# EAGLE board core (EAGLE 7.1.0)
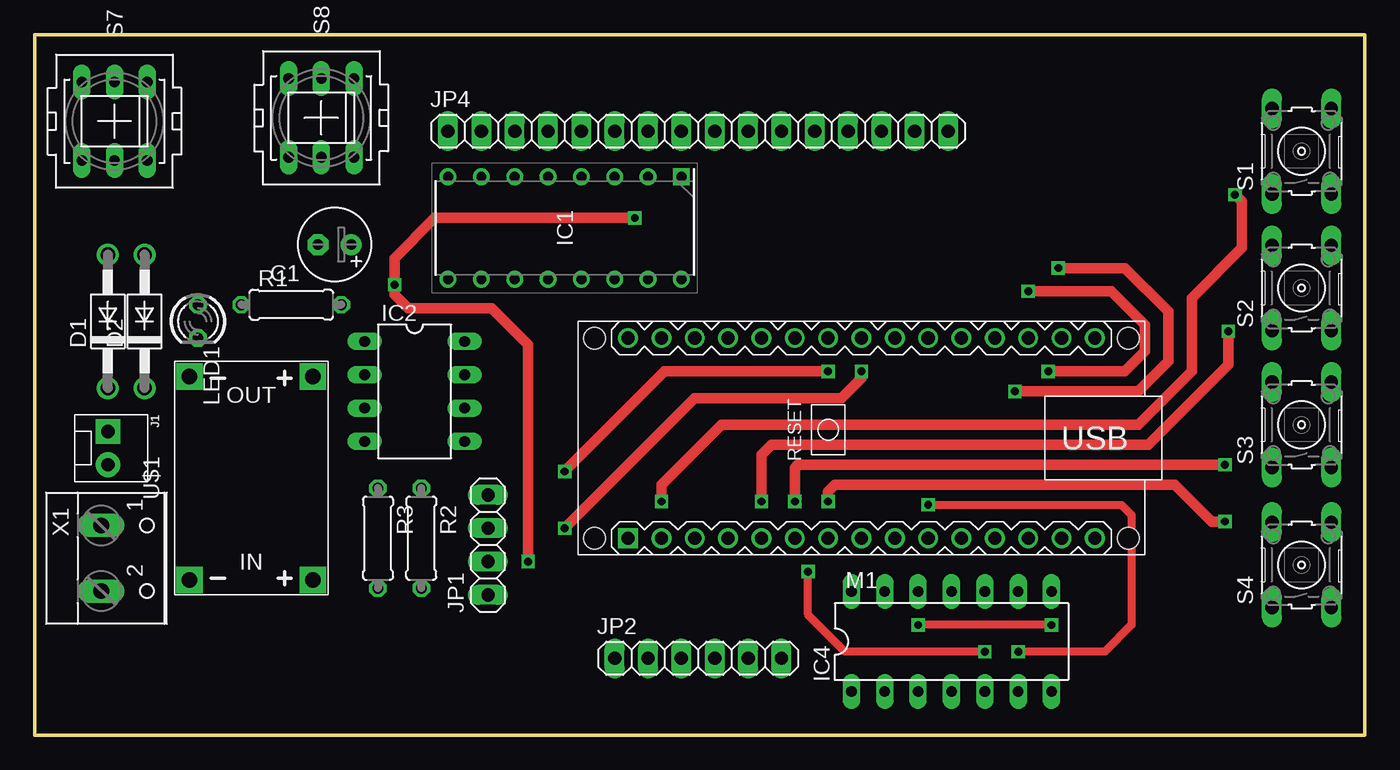
[diagram p0: board, top side]
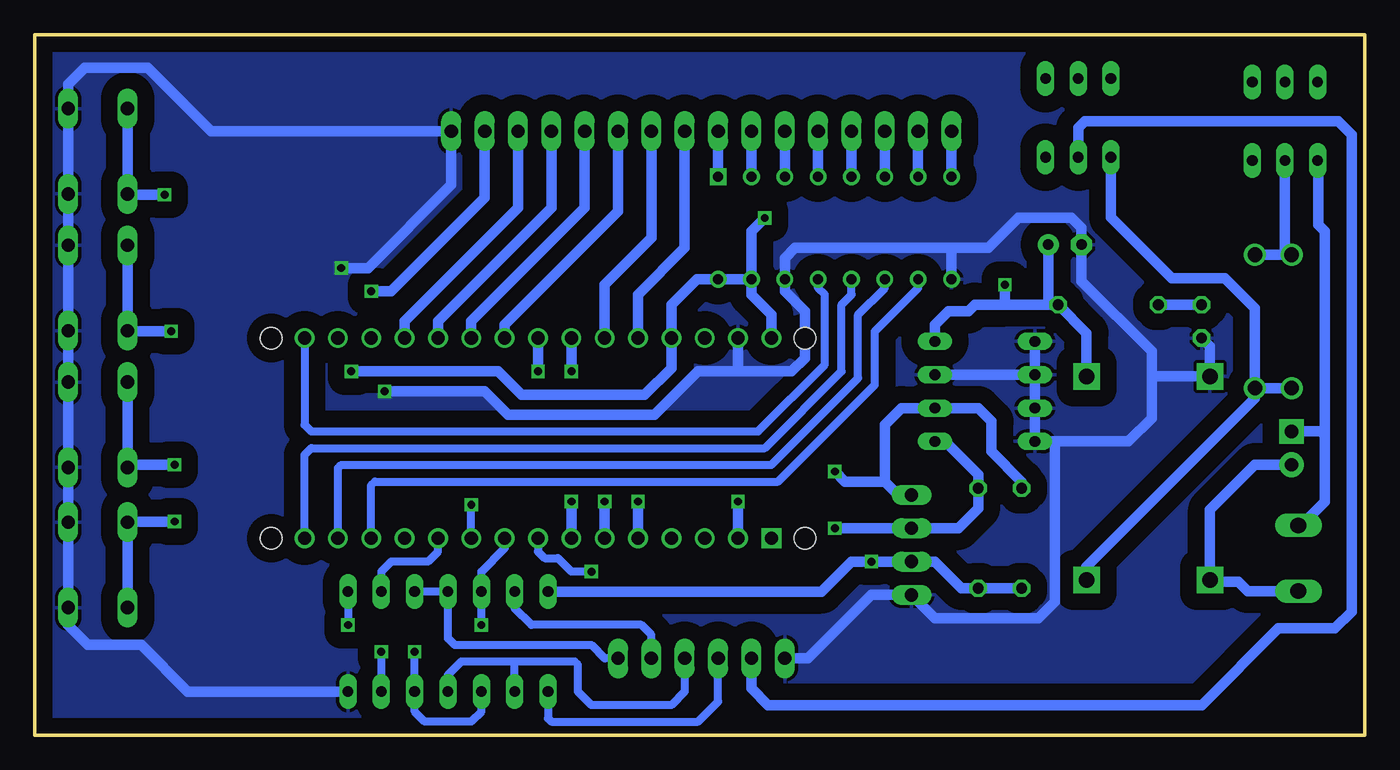
[diagram p1: board, bottom side, seen from below]

Size 101.35 x 53.34 mm. Coordinates in mm from the lower left corner, seen from the top.
Outline: 0,53.34 101.35,53.34 101.35,0 0,0 0,53.34
Copper layers (1*16): Top 0.035mm / dielectric 1.5mm / Bottom 0.035mm
Design rules "default *": minimum track width 10mil, minimum drill 24mil, track to track 50mil, track to pad 50mil, pad to pad 8mil, via to via 8mil, smd to smd 8mil, copper to edge 40mil, drill to drill 8mil, minimum pad ring 10mil, minimum via ring 8mil, stop-mask expansion 4mil, vias tented up to drill 0mil, thermal gap 10mil

## Footprints (pad centres in the part's own frame; a part is rotated, then mirrored left to right if it is on the bottom)
E2,5-6 = drill 0.813 pad 1.6: + -1.27,0 | drill 0.813 pad 1.6 octagon: - 1.27,0
DO41-10 = drill 1.118: A 5.08,0; C -5.08,0
DIP781W56P254L1918H533Q16N = drill 0.759 pad 1.159 square: 1 -3.905,8.89 | drill 0.759 pad 1.159: 2 -3.905,6.35; 3 -3.905,3.81; 4 -3.905,1.27; 5 -3.905,-1.27; 6 -3.905,-3.81; 7 -3.905,-6.35; 8 -3.905,-8.89; 9 3.905,-8.89; 10 3.905,-6.35; 11 3.905,-3.81; 12 3.905,-1.27; 13 3.905,1.27; 14 3.905,3.81; 15 3.905,6.35; 16 3.905,8.89
DIL08 = drill 0.813 long: 1 -3.81,-3.81; 2 -1.27,-3.81; 3 1.27,-3.81; 4 3.81,-3.81; 5 3.81,3.81; 6 1.27,3.81; 7 -1.27,3.81; 8 -3.81,3.81
DIL14 = drill 0.813 long: 1 -7.62,-3.81; 2 -5.08,-3.81; 3 -2.54,-3.81; 4 0,-3.81; 5 2.54,-3.81; 6 5.08,-3.81; 7 7.62,-3.81; 8 7.62,3.81; 9 5.08,3.81; 10 2.54,3.81; 11 0,3.81; 12 -2.54,3.81; 13 -5.08,3.81; 14 -7.62,3.81
MOLEX-1X2 = drill 1.016 pad 1.88 square: 1 0,0 | drill 1.016 pad 1.88: 2 2.54,0
1X04 = drill 1.016 long: 1 -3.81,0; 2 -1.27,0; 3 1.27,0; 4 3.81,0
1X06 = drill 1.016 long: 1 -6.35,0; 2 -3.81,0; 3 -1.27,0; 4 1.27,0; 5 3.81,0; 6 6.35,0
1X16 = drill 1.016 long: 1 -19.05,0; 2 -16.51,0; 3 -13.97,0; 4 -11.43,0; 5 -8.89,0; 6 -6.35,0; 7 -3.81,0; 8 -1.27,0; 9 1.27,0; 10 3.81,0; 11 6.35,0; 12 8.89,0; 13 11.43,0; 14 13.97,0; 15 16.51,0; 16 19.05,0
LED3MM = drill 0.813 octagon: A -1.27,0; K 1.27,0
ARDUINO-NANO-3.0 = drill 1 square: J1.1 17.78,7.62 | drill 1: J1.2 15.24,7.62; J1.3 12.7,7.62; J1.4 10.16,7.62; J1.5 7.62,7.62; J1.6 5.08,7.62; J1.7 2.54,7.62; J1.8 0,7.62; J1.9 -2.54,7.62; J1.10 -5.08,7.62; J1.11 -7.62,7.62; J1.12 -10.16,7.62; J1.13 -12.7,7.62; J1.14 -15.24,7.62; J1.15 -17.78,7.62; J2.1 17.78,-7.62; J2.2 15.24,-7.62; J2.3 12.7,-7.62; J2.4 10.16,-7.62; J2.5 7.62,-7.62; J2.6 5.08,-7.62; J2.7 2.54,-7.62; J2.8 0,-7.62; J2.9 -2.54,-7.62; J2.10 -5.08,-7.62; J2.11 -7.62,-7.62; J2.12 -10.16,-7.62; J2.13 -12.7,-7.62; J2.14 -15.24,-7.62; J2.15 -17.78,-7.62 | hole 1.651: -20.32,7.62; -20.32,-7.62; 20.32,-7.62; 20.32,7.62
0207/7 = drill 0.813 octagon: 1 -3.81,0; 2 3.81,0
B3F-10XX = drill 1.016 long: 1 -3.251,2.261; 2 3.251,2.261; 3 -3.251,-2.261; 4 3.251,-2.261
PVA2R = drill 0.813 long: 1 -2.997,2.489; 2 -2.997,0; 3 -2.997,-2.489; 4 2.997,2.489; 5 2.997,0; 6 2.997,-2.489
DC-DC-STEP-DOWN-MP2307 = drill 1.2 pad 2 square: IN+ -7.747,-4.699; IN- -7.747,4.699; OUT+ 7.747,-4.699; OUT- 7.747,4.699
W237-102 = drill 1.194 long: 1 -2.5,-1.27; 2 2.5,-1.27

## Placement (x,y rotation side)
C1  [E2,5-6]  22.86,37.34 180 top
D1  1N4004  [DO41-10]  5.59,31.5 90 top
D2  1N4004  [DO41-10]  8.38,31.5 90 top
IC1  MCP3008-I_P  [DIP781W56P254L1918H533Q16N]  40.39,38.61 270 top
IC2  AT24CP  [DIL08]  28.96,26.16 270 top
IC4  7402N  [DIL14]  69.85,7.11 0 top
J1  [MOLEX-1X2]  5.59,23.11 270 top
JP1  [1X04]  34.54,14.48 90 top
JP2  [1X06]  50.55,5.84 0 top
JP4  [1X16]  50.55,45.97 0 top
LED1  [LED3MM]  12.45,31.5 270 top
M1  ARDUINO-NANO-3.0  [ARDUINO-NANO-3.0]  62.99,22.61 180 top
R1  330  [0207/7]  19.56,32.77 0 top
R2  4.7K  [0207/7]  29.46,14.99 270 top
R3  4.7K  [0207/7]  26.16,14.99 270 top
S1  [B3F-10XX]  96.52,44.45 90 top
S2  [B3F-10XX]  96.52,34.04 90 top
S3  [B3F-10XX]  96.52,23.62 90 top
S4  [B3F-10XX]  96.52,12.95 90 top
S7  [PVA2R]  6.1,46.74 90 top
S8  [PVA2R]  21.84,46.99 90 top
U$1  DC-DC-STEP-DOWN-MP2307  [DC-DC-STEP-DOWN-MP2307]  16.51,19.56 90 top
X1  [W237-102]  6.35,13.46 270 top

## Library data of the parts
C1 R1-R3 = rcl
D1 D2 = diode
IC1 = MCP3008-I_P; ALLIED_NUMBER: 70414364; ALLIED_PRICE-STOCK: http://www.alliedelec.com/microchip-technology-inc-mcp3008-i-p/70414364/; DESCRIPTION: 2.7V 4-Channel/8-Channel 10-Bit A/D Converterswith SPI Serial Interface; HEIGHT: 5.334mm; MANUFACTURER_NAME: Microchip; MANUFACTURER_PART_NUMBER: MCP3008-I/P; MOUSER_PART_NUMBER: 579-MCP3008-I/P; MOUSER_PRICE-STOCK: https://www.mouser.com/Search/Refine.aspx?Keyword=579-MCP3008-I%2FP; RS_PART_NUMBER: 6696064P; RS_PRICE-STOCK: http://uk.rs-online.com/web/p/products/6696064P
IC2 = atmel; MPN: AT24C1024BW-SH-B; OC_FARNELL: 1362646; OC_NEWARK: 03P2044
IC4 = 74xx-us
J1 = SparkFun-Retired; SF_ID: PRT-09918
JP1 JP2 JP4 = pinhead
LED1 = led
M1 U$1 = diy-modules
S1-S4 = switch-omron; MPN: B3F-1000; OC_FARNELL: 176432; OC_NEWARK: 36M3542
S7 S8 = switch-misc
X1 = con-wago-500; MPN: 237-102; OC_FARNELL: unknown; OC_NEWARK: 70K9898

## Nets
1A: IC4.1 JP2.3
1B: IC4.2 IC4.4 JP2.4
2A: IC4.13 JP2.5
2B: IC4.10 IC4.11 JP2.6
3V3: M1.J2.14
5V: C1.+ IC1.15 IC1.16 IC2.8 IC4.14 JP1.2 JP4.15 M1.J2.1 M1.J2.4 R1.2 R2.2 R3.2 U$1.OUT+
12V: J1.1 S7.1 X1.1
12VI: D1.C D2.C S8.1 U$1.IN+
A0: JP4.14 M1.J2.12
A1: JP4.13 M1.J2.11
A2: JP4.12 M1.J2.10
A3: JP4.11 M1.J2.9
A4: JP4.10 M1.J2.6
A5: JP4.9 M1.J2.5
A6: IC1.1 JP4.8
A7: IC1.2 JP4.7
A8: IC1.3 JP4.6
A9: IC1.4 JP4.5
A10: IC1.5 JP4.4
A11: IC1.6 JP4.3
A12: IC1.7 JP4.2
A13: IC1.8 JP4.1
B1: M1.J1.1
B2: M1.J1.2 S1.1 S1.2
B3: M1.J1.5 S2.1 S2.2
B4: M1.J1.6 S3.1 S3.2
B5: M1.J1.7 S4.1 S4.2
B6: M1.J1.12
CS: IC1.10 M1.J1.13
DIR1: IC4.6 M1.J1.10
DIR2: IC4.9 M1.J1.11
GND: C1.- IC1.9 IC1.14 IC2.1 IC2.2 IC2.3 IC2.4 IC2.7 IC4.7 JP1.1 JP2.1 JP4.16 LED1.K M1.J2.2 S1.3 S1.4 S2.3 S2.4 S3.3 S3.4 S4.3 S4.4 U$1.OUT-
GND.1: M1.J1.4
GND_IN: J1.2 U$1.IN- X1.2
MISO: IC1.12 M1.J1.15
MOSI: IC1.11 M1.J1.14
N$1: D1.A D2.A S7.2
N$2: LED1.A R1.1
N$4: JP2.2 S8.2
PWM1: IC4.3 IC4.5 M1.J1.8
PWM2: IC4.8 IC4.12 M1.J1.9
RST: M1.J2.3
SCK: IC1.13 M1.J2.15
SCL: IC2.6 JP1.4 M1.J2.7 R3.1
SDA: IC2.5 JP1.3 M1.J2.8 R2.1

## Tracks (layer width: path | path; a pad name or v marks a point on that pad's centre or on a via)
1A
  Bottom 0.61: IC4.1 62.23,1.27 61.98,1.02 50.8,1.02 49.28,2.54 JP2.3
1B
  Bottom 0.61: IC4.2 64.77,5.59 | IC4.4 69.85,4.57 68.83,5.59 64.77,5.59 | JP2.4 51.82,3.3 52.83,2.29 58.93,2.29 59.94,3.3 59.94,5.33 60.2,5.59 64.77,5.59
2A
  Bottom 0.61: JP2.5 54.36,7.62 55.12,8.38 63.5,8.38 64.77,9.65 IC4.13
2B
  Bottom 0.61: IC4.10 IC4.11 69.85,7.37 69.34,6.86 58.93,6.86 57.91,5.84 JP2.6
5V  (via drill 0.6)
  Top 0.813: v77.22,27.69 83.06,27.69 84.58,29.21 84.58,31.24 82.04,33.78 v75.69,33.78 | v45.72,39.37 30.48,39.37 27.43,36.32 v27.43,34.29 27.43,33.53 28.45,32.51 34.8,32.51 37.59,29.72 v37.59,13.21
  Bottom 0.813: IC2.8 32.77,31.24 31.75,32.26 30.23,32.26 29.72,32.77 27.43,32.77 | IC1.15 IC1.16 50.89,34.7 52.83,32.77 M1.J2.4 52.83,27.94 54.86,25.91 64.26,25.91 66.04,27.69 v77.22,27.69 | M1.J2.1 45.21,32 46.74,33.53 IC1.15 | R3.2 R2.2 30.73,11.18 32.77,13.21 JP1.2 v37.59,13.21 39.12,13.21 41.4,10.92 IC4.14 | v75.69,33.78 74.17,33.78 67.06,40.89 JP4.15 | IC1.15 46.74,38.35 v45.72,39.37 | v27.43,34.29 27.43,32.77 | 23.88,32.77 R1.2 21.21,30.61 U$1.OUT+ | 23.88,32.77 27.43,32.77 | C1.+ 24.13,33.02 23.88,32.77
12V
  Bottom 0.813: X1.1 4.87,15.96 3.05,17.78 3.05,22.86 | J1.1 3.3,23.11 3.05,22.86 | 3.05,22.86 3.05,38.35 3.56,38.86 3.56,42.93 S7.1
12VI
  Bottom 0.813: S8.1 19.35,39.42 14.73,34.8 10.67,34.8 8.38,32.51 D2.C | D1.C D2.C | D2.C 8.38,25.65 21.21,12.83 U$1.IN+
A0
  Bottom 0.813: M1.J2.12 73.15,31.5 64.52,40.13 JP4.14
A1
  Bottom 0.813: M1.J2.11 70.61,31.5 61.98,40.13 JP4.13
A2
  Bottom 0.813: M1.J2.10 68.07,31.5 59.44,40.13 JP4.12
A3
  Bottom 0.813: M1.J2.9 65.53,31.24 56.9,39.88 JP4.11
A4
  Bottom 0.813: M1.J2.6 57.91,34.29 54.36,37.85 JP4.10
A5
  Bottom 0.813: M1.J2.5 55.37,33.53 51.82,37.08 JP4.9
A6
  Bottom 0.813: IC1.1 JP4.8
A7
  Bottom 0.813: IC1.2 JP4.7
A8
  Bottom 0.813: IC1.3 JP4.6
A9
  Bottom 0.813: JP4.5 IC1.4
A10
  Bottom 0.813: JP4.4 IC1.5
A11
  Bottom 0.813: JP4.3 IC1.6
A12
  Bottom 0.813: JP4.2 IC1.7
A13
  Bottom 0.813: JP4.1 IC1.8
B2  (via drill 0.6)
  Top 0.813: v47.75,17.78 47.75,19.05 52.32,23.62 84.07,23.62 88.14,27.69 88.14,33.27 91.95,37.08 91.95,40.64 v91.44,41.15
  Bottom 0.813: S1.2 S1.1 94.21,41.15 v91.44,41.15 | M1.J1.2 v47.75,17.78
B3  (via drill 0.6)
  Top 0.813: v55.37,17.78 55.37,21.34 56.13,22.1 84.84,22.1 90.93,28.19 v90.93,30.73
  Bottom 0.813: S2.2 S2.1 94.21,30.73 v90.93,30.73 | M1.J1.5 v55.37,17.78
B4  (via drill 0.6)
  Top 0.813: v57.91,17.78 57.91,20.32 58.17,20.57 v90.68,20.57
  Bottom 0.813: S3.2 S3.1 94.06,20.57 v90.68,20.57 | M1.J1.6 v57.91,17.78
B5  (via drill 0.6)
  Top 0.813: v60.45,17.78 60.45,18.54 60.96,19.05 86.87,19.05 89.66,16.26 v90.68,16.26
  Bottom 0.813: S4.1 S4.2 94.21,16.26 v90.68,16.26 | M1.J1.7 v60.45,17.78
CS
  Bottom 0.61: M1.J1.13 75.69,19.05 75.44,19.3 44.7,19.3 37.34,26.67 37.34,30.73 34.04,34.04 IC1.10
DIR1  (via drill 0.6)
  Top 0.61: v68.07,17.53 82.8,17.53 83.57,16.76 83.57,8.38 81.53,6.35 v74.93,6.35
  Bottom 0.61: M1.J1.10 v68.07,17.53 | v74.93,6.35 IC4.6
DIR2
  Bottom 0.61: M1.J1.11 70.61,13.97 71.37,13.21 74.17,13.21 74.93,12.45 IC4.9
GND  (via drill 0.6)
  Top 0.813: v74.68,26.16 84.07,26.16 86.36,28.45 86.36,32.26 83.06,35.56 v77.98,35.56
  Bottom 0.813: IC2.2 IC2.3 IC2.4 23.62,22.35 | IC2.2 IC2.1 | IC2.7 IC2.2 | 23.62,22.35 18.03,22.35 16.26,24.13 16.26,27.18 | M1.J2.2 47.75,27.69 | IC1.9 31.5,36.83 31.24,37.08 | 31.24,37.08 28.7,37.08 26.42,39.37 22.35,39.37 21.59,38.61 C1.- 21.59,34.54 16.26,29.21 16.26,27.18 | 31.24,37.08 43.43,37.08 44.2,36.32 IC1.14 44.2,33.78 42.67,32.26 42.67,28.7 43.69,27.69 47.75,27.69 | 23.62,22.35 23.62,10.16 24.89,8.89 32.77,8.89 JP1.1 37.59,10.67 42.42,5.84 JP2.1 | 47.75,27.69 50.8,27.69 54.1,24.38 65.28,24.38 67.06,26.16 v74.68,26.16 | v77.98,35.56 75.95,35.56 69.6,41.91 JP4.16 87.88,45.97 92.71,50.8 97.54,50.8 98.78,49.55 S1.4 S1.3 S2.4 S2.3 S3.4 S3.3 S4.4 S4.3 98.81,9.68 98.81,8.38 97.28,6.86 93.22,6.86 89.66,3.3 IC4.7 | LED1.K 11.81,29.59 U$1.OUT- 16.13,27.3 16.26,27.18
  pour Bottom: 0,53.34 101.35,53.34 101.35,0 0,0
GND_IN
  Bottom 0.813: J1.2 8.38,20.57 11.81,17.14 U$1.IN- 11.68,11.68 9.65,11.68 8.93,10.96 X1.2
MISO
  Bottom 0.61: M1.J1.15 80.77,21.34 80.26,21.84 45.72,21.84 39.88,27.69 39.88,32.77 39.12,33.53 IC1.12
MOSI
  Bottom 0.61: M1.J1.14 78.23,20.32 77.98,20.57 45.21,20.57 38.61,27.18 38.61,32 36.58,34.04 IC1.11
N$1
  Bottom 0.813: D2.A 6.1,36.58 | 6.1,36.58 D1.A | S7.2 6.1,36.58
N$2
  Bottom 0.813: R1.1 LED1.A
N$3
  Bottom 0.127: 0,53.34 101.35,53.34 101.35,0 0,0 0,53.34
N$4
  Bottom 0.813: JP2.2 46.74,3.56 45.47,2.29 12.45,2.29 6.6,8.13 2.29,8.13 1.02,9.4 1.02,45.72 2.03,46.74 21.34,46.74 21.84,46.23 S8.2
N$5
  Top 0.127: 0,53.34 101.35,53.34 101.35,0 0,0 0,53.34
PWM1  (via drill 0.6)
  Top 0.61: v72.39,6.35 61.72,6.35 58.93,9.14 v58.93,12.45
  Bottom 0.61: IC4.3 67.31,1.78 68.07,1.02 71.63,1.02 72.39,1.78 IC4.5 v72.39,6.35 | v58.93,12.45 60.45,12.45 61.47,13.46 62.48,13.46 62.99,13.97 M1.J1.8
PWM2  (via drill 0.6)
  Top 0.61: v77.47,8.38 v67.31,8.38
  Bottom 0.61: M1.J1.9 65.53,14.22 67.31,12.45 IC4.12 v67.31,8.38 | IC4.8 v77.47,8.38
SCK
  Bottom 0.61: IC1.13 41.66,34.04 41.15,33.53 41.15,28.19 46.23,23.11 80.26,23.11 80.77,23.62 M1.J2.15
SCL  (via drill 0.6)
  Top 0.813: v60.45,27.69 48.01,27.69 v40.39,20.07
  Bottom 0.813: R3.1 26.16,19.3 28.45,21.59 28.45,23.88 29.46,24.89 IC2.6 35.31,24.89 36.58,23.62 36.58,19.3 | JP1.4 35.56,18.29 36.58,19.3 | M1.J2.7 v60.45,27.69 | 36.58,19.3 39.62,19.3 v40.39,20.07
SDA  (via drill 0.6)
  Top 0.813: v62.99,27.69 62.99,27.18 61.47,25.65 50.29,25.65 v40.39,15.75
  Bottom 0.813: IC2.5 32,22.35 29.46,19.81 R2.1 29.46,17.27 30.99,15.75 JP1.3 v40.39,15.75 | M1.J2.8 v62.99,27.69